# Altium PCB PCB1.PcbDoc
Units mm, origin at the board's own origin, x right, y up, seen from the top; angles counter-clockwise.
Board outline 99.5 x 83 mm, 2 copper layers (Top Layer, Bottom Layer), stack 1.135 mm thick; 86 components, 60 nets, 288 pads, 89 vias.
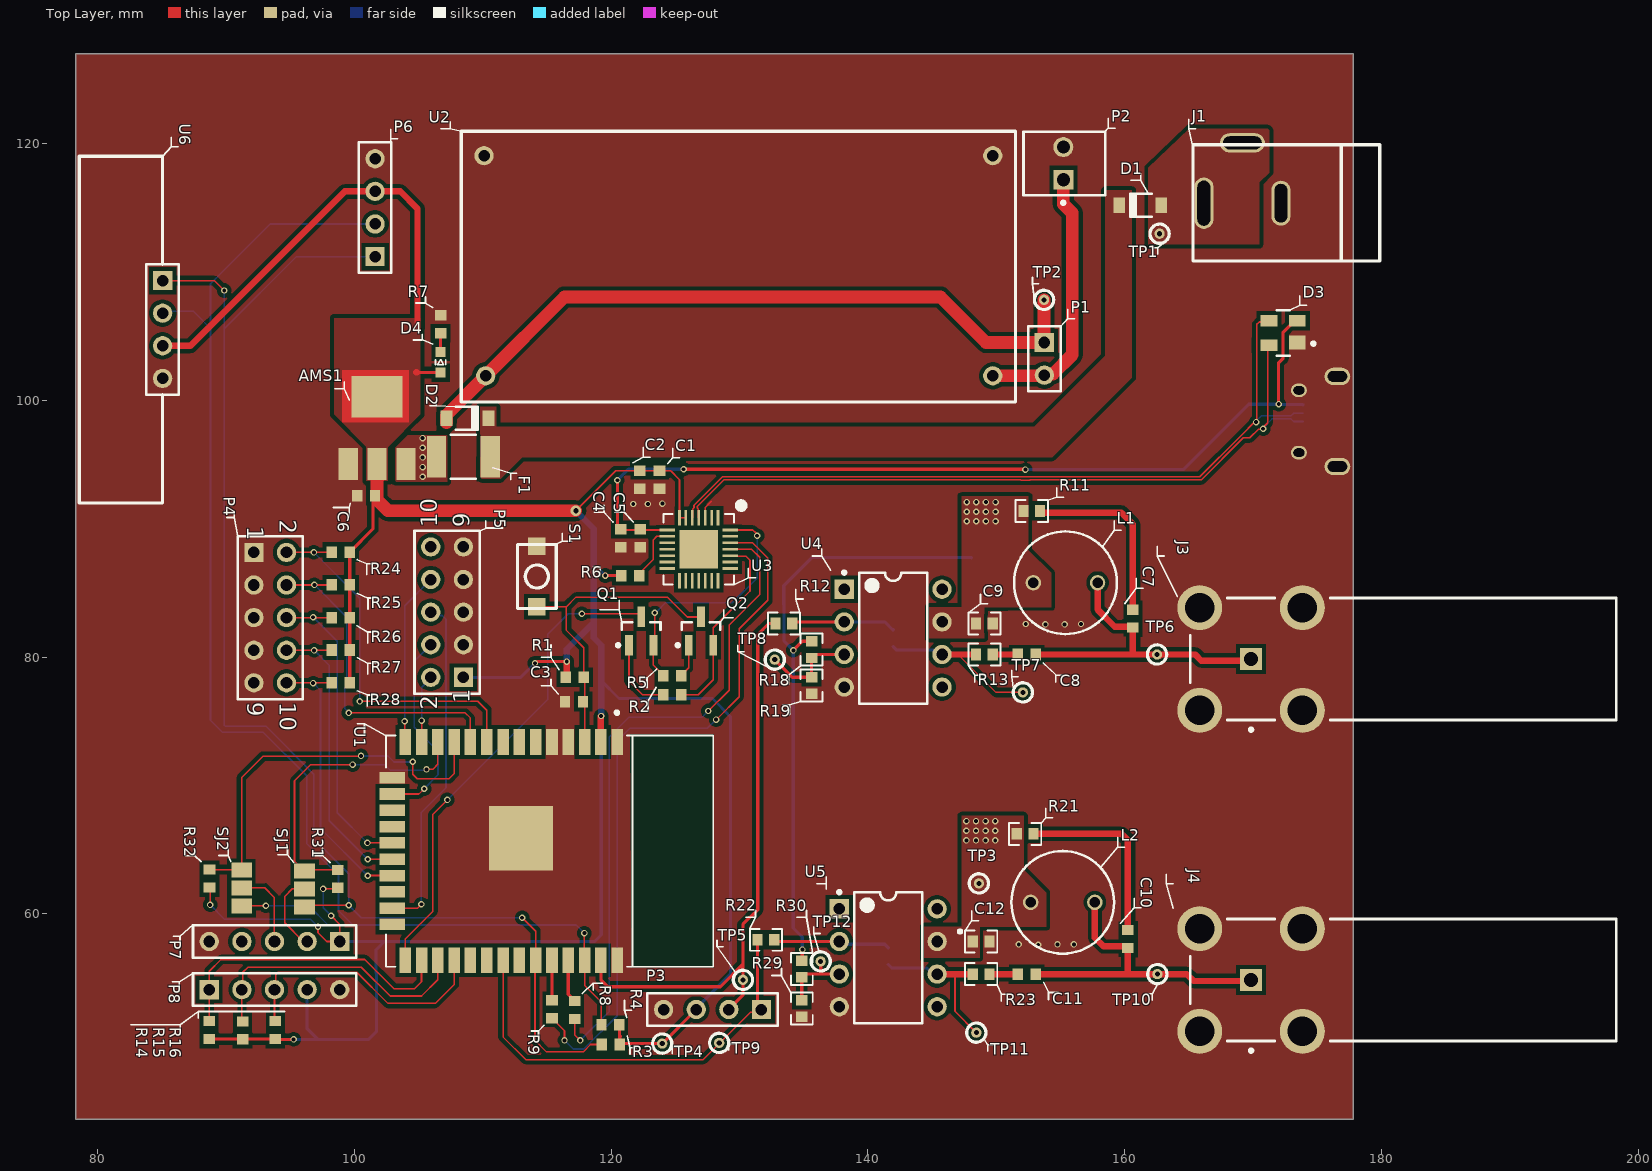
[diagram p0: Top Layer view]
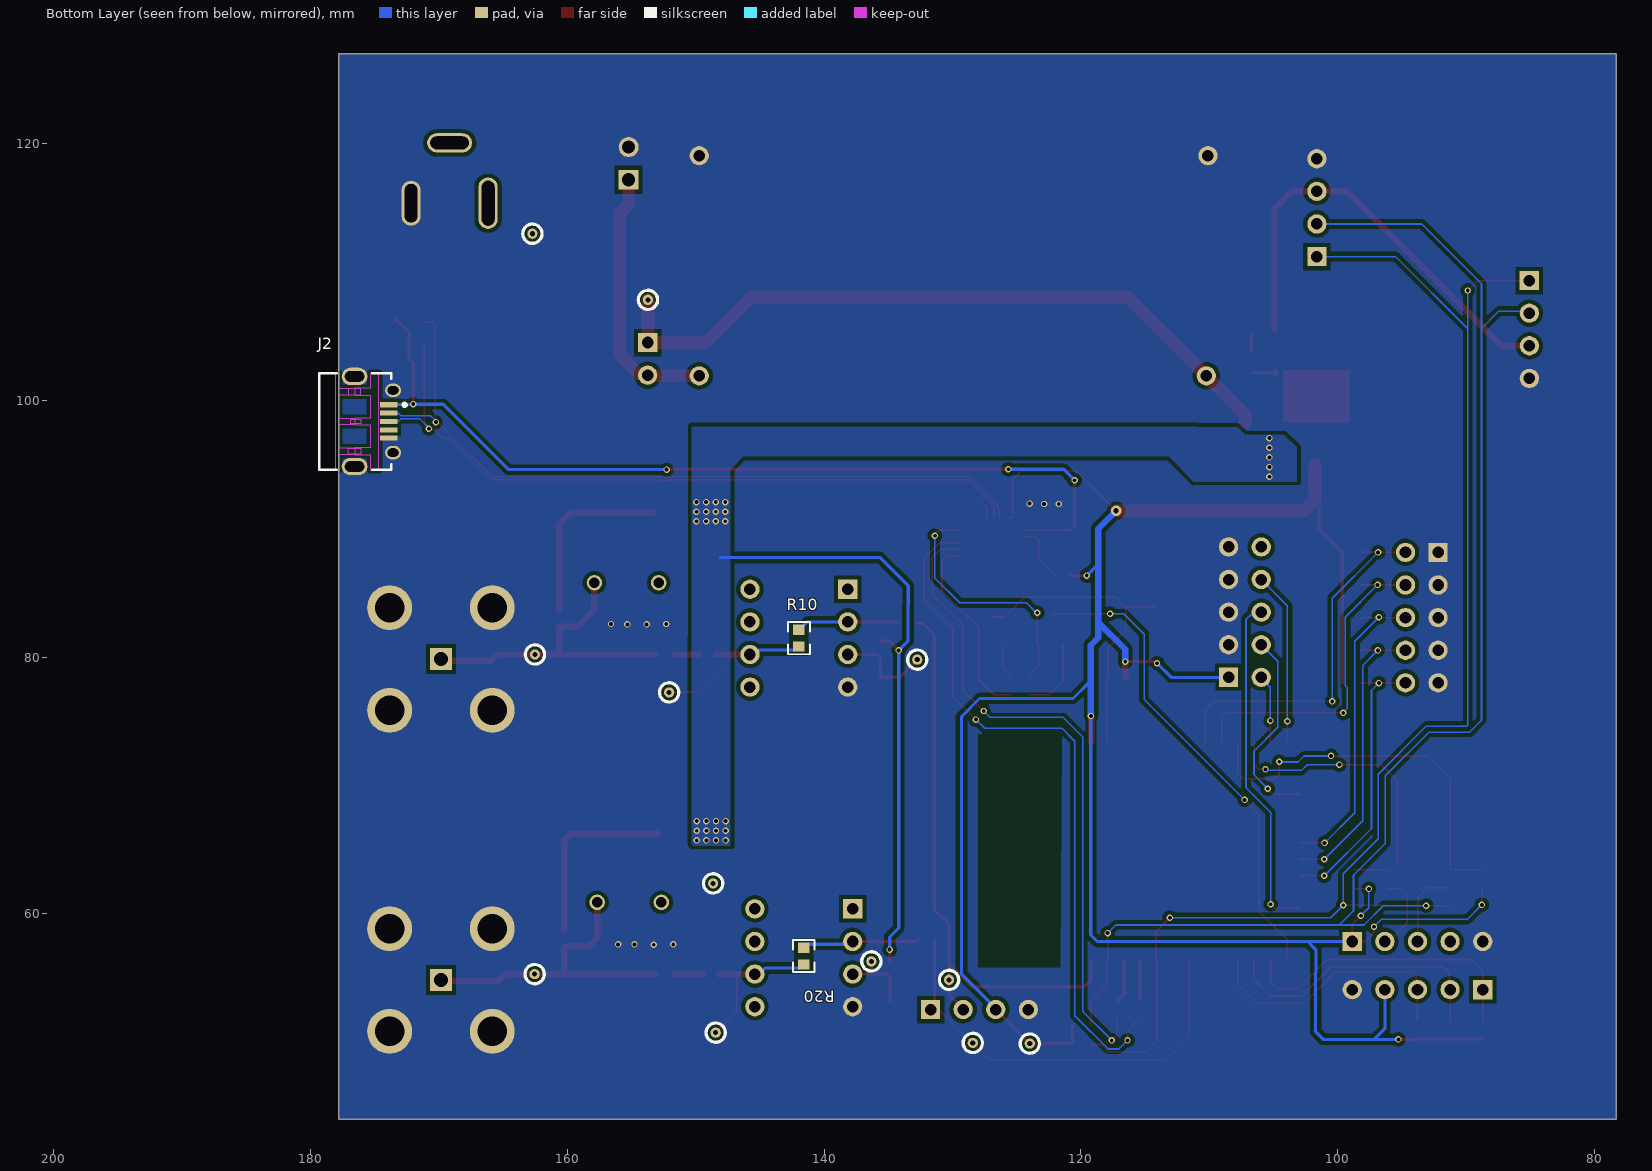
[diagram p1: Bottom Layer view, seen from below]
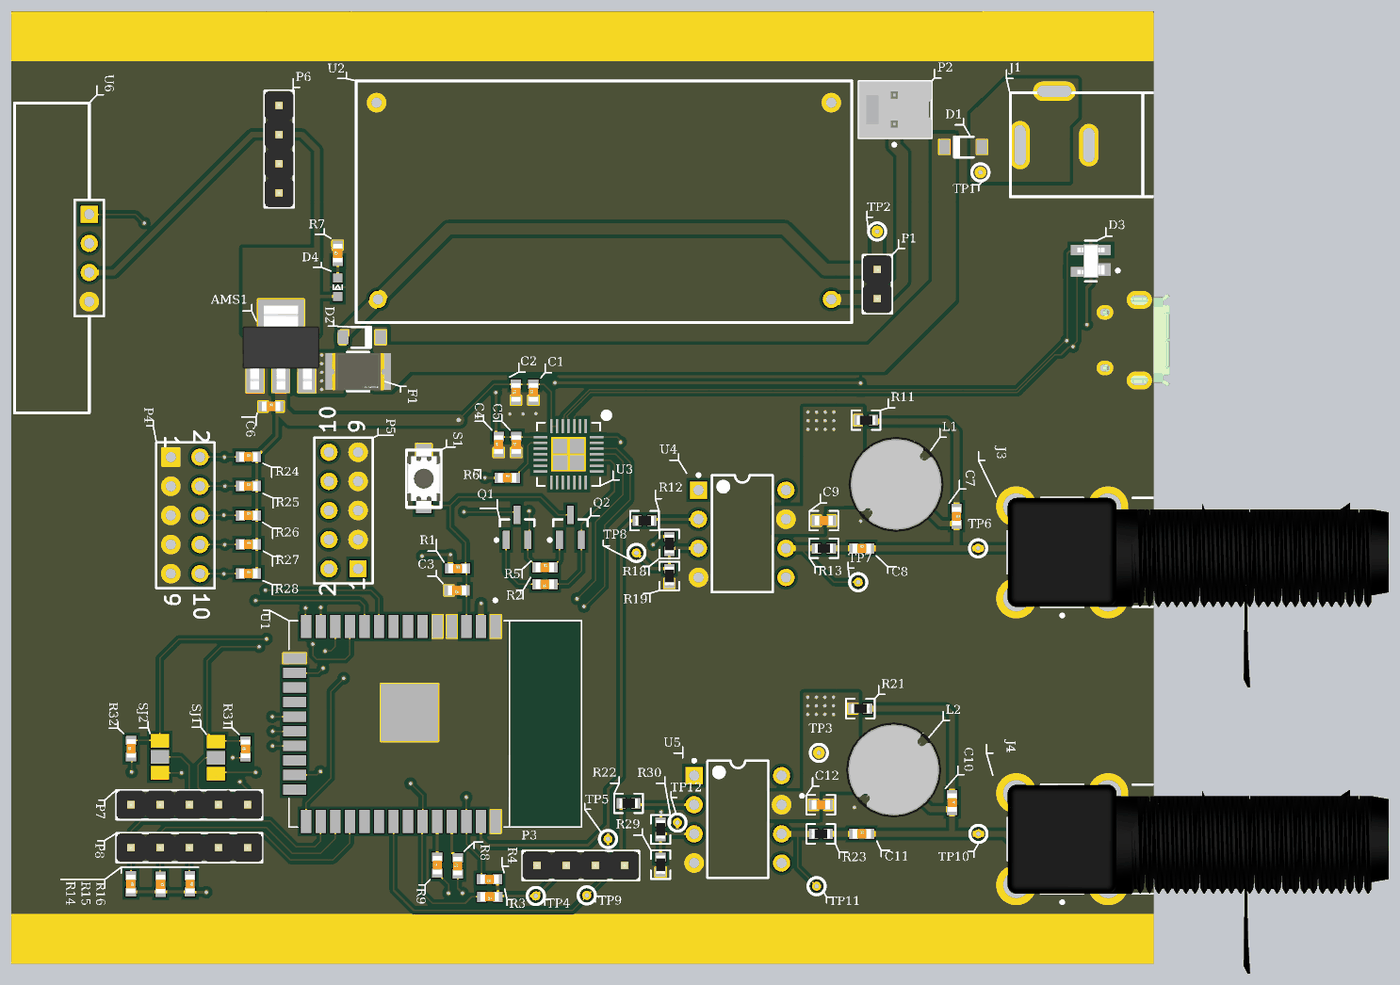
[diagram p2: 3D render of the assembled board from above, using the file's embedded part models]
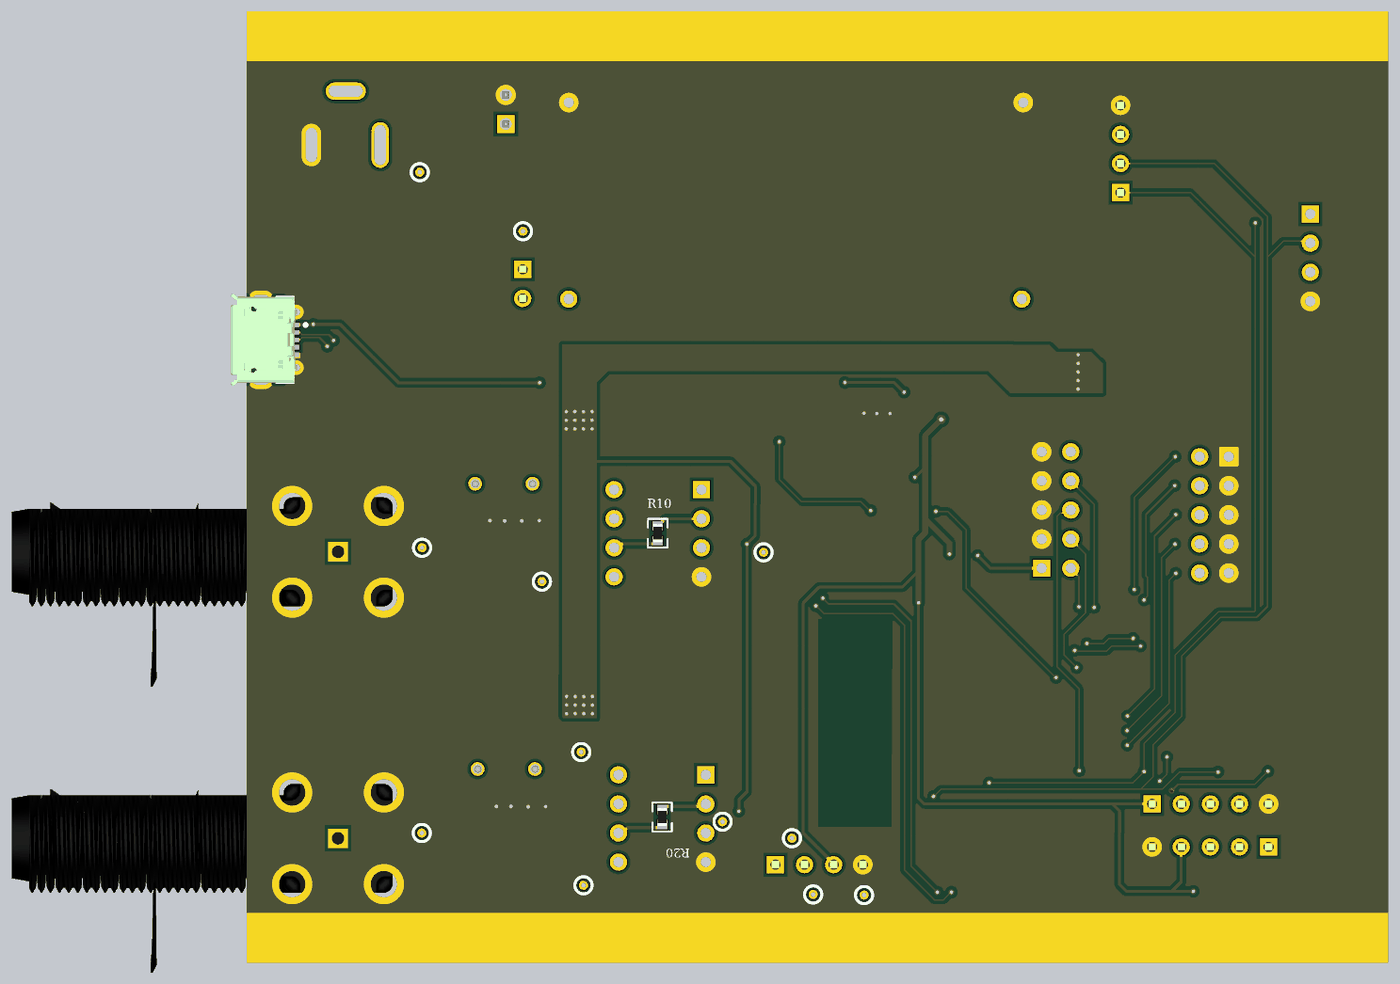
[diagram p3: 3D render of the assembled board from below, using the file's embedded part models]

## Layer stack, top to bottom
Top Solder: solder mask 0.0102, Solder Resist, Dk 3.5
Top Layer: signal copper 0.035
Dielectric 1: dielectric 1.065, FR-4, Dk 4.8
Bottom Layer: signal copper 0.035
Bottom Solder: solder mask 0.0102, Solder Resist, Dk 3.5

## Board outline
78.3,44 177.8,44 177.8,127 78.3,127

## Design rules (kind name [scope] priority, off if disabled: settings)
Clearance Clearance_1 [InPolygon] p1: gap=0.3 ignorepadtopadclearanceinfootprint=FALSE
Clearance [All] p2: gap=0.254 ignorepadtopadclearanceinfootprint=FALSE except(0: Arc-Hole Track-Hole SMDPad-Hole THPad-Hole Via-Hole Fill-Hole Poly-Hole Region-Hole Text-Hole)
DiffPairsRouting [All] p1: maxlimit=0.254 minlimit=0.125 mostfreqgap=0.125 toplayer_minwidth=0.125 toplayer_maxwidth=0.381 toplayer_prefwidth=0.125 bottomlayer_minwidth=0.125 bottomlayer_maxwidth=0.381 bottomlayer_prefwidth=0.125 maxuncoupledlength=12.7
PolygonConnect [All] p1: connectstyle=Direct reliefconductorwidth=0.254 reliefentries=4 polygonreliefangle="90 Angle" airgapwidth=0.254
RoutingVias [All] p1: holewidth=0.3 width=0.5 viastyle="Through Hole" minholewidth=0.3 minwidth=0.5 maxholewidth=0.3 maxwidth=0.5
SolderMaskExpansion [All] p1: expansion=0.102 istentingtop=FALSE
Width [All] p1: maxlimit=2 minlimit=0.1 preferedwidth=0.254
29 further rules are at their usual default settings.

## Classes and differential pairs
differential pair D: +D_P -D_N

## Components (designator, comment, footprint, x,y, rotation, side; value= is the part's Value field where it differs from the comment)
AMS1 "AMS1117" SOT-223-3 98.525,94.275 r0 top
C1 "10uF" "C 0603 / 1608" 123.776,93.808 r90 top
C2 "1uF" "C 0603 / 1608" 122.252,93.808 r90 top
C3 "100nF" "C 0603 / 1608" 117.119,76.534 r180 top
C4 "10uF" "C 0603 / 1608" 120.753,89.254 r90 top
C5 "1uF" "C 0603 / 1608" 122.277,89.254 r90 top
C6 "22uF" "C 0603 / 1608" 100.925,92.575 r0 top
C7 "Cap" "C 0603 / 1608" 160.64,82.996 r270 top value=54n
C8 "Cap" "C 0603 / 1608" 152.385,80.202 r0 top value=3.3u
C9 "Cap Pol1" CAP0603R 149.083,82.615 r0 top value=100u
C10 "Cap" "C 0603 / 1608" 160.259,58.039 r270 top value=54n
C11 "Cap" "C 0603 / 1608" 152.385,55.31 r0 top value=3.3u
C12 "Cap Pol1" CAP0603P 148.829,57.85 r0 top value=100u
D1 "B5819W" MCC-SOD123_V 161.223,115.189 r180 top
D2 "B5819W" MCC-SOD123_V 108.825,98.6 r0 top
D3 "Diode_Littelfuse_SP0503BAHTG_eec" Littelfuse_SP0503BAHTG_0 172.35,105.25 r90 top
D4 "LED" "LED 0603(2)" 106.725,102.925 r90 top
F1 "MF-MSMF014-2" FP-MF-MSMF-1-MFG 108.5,95.6 r180 top value=0.4-6.5Ω
J1 "PWR2.5" BARREL_JACK_5MM 166.175,115.35 r90 top locked
J2 "ZX62D-B-5P8" HIRO-ZX62D-B-5P8_V 175.075,98.35 r270 bottom
J3 "5-1634552-1" TE_5-1634552-1_0 181.7,79.85 r90 top locked
J4 "5-1634552-1" TE_5-1634552-1_0 181.7,54.85 r90 top locked
L1 "1mH" WE-TI-LS 155.393,85.79 r180 top
L2 "1mH" WE-TI-LS 155.179,60.898 r180 top
P1 "Header 2" HDR1X2 153.75,104.5 r270 top
P2 "22-23-2021" MOLX-22-23-2021_V 155.225,118.45 r90 top
P3 "Header 4" HDR1X4 131.715,52.55 r180 top
P4 "Header 5X2" HDR2X5 92.185,88.155 r270 top
P5 "Header 5X2" HDR2X5 108.5,78.42 r90 top
P6 "Header 4" HDR1X4 101.625,111.195 r90 top
P7 "Header 5" HDR1X5 98.87,57.85 r180 top
P8 "Header 5" HDR1X5 88.71,54.1 r0 top
Q1 "MMBT2222LT1G" ONSC-SOT-23-3-318-08_M 122.35,82.025 r90 top
Q2 "MMBT2222LT1G" ONSC-SOT-23-3-318-08_M 127,82.025 r90 top
R1 "Res1" "C 0603 / 1608" 117.181,78.439 r0 top value=10k
R2 "Res1" "C 0603 / 1608" 124.775,77.075 r180 top value=10k
R3 "Res1" "C 0603 / 1608" 119.975,49.825 r180 top value=4.7k
R4 "Res1" "C 0603 / 1608" 119.95,51.35 r180 top value=4.7k
R5 "Res1" "C 0603 / 1608" 124.775,78.55 r0 top value=10k
R6 "Res1" "C 0603 / 1608" 121.5,86.35 r0 top value=4.7k
R7 "Res1" "C 0603 / 1608" 106.725,105.925 r90 top value=1k
R8 "Res1" "C 0603 / 1608" 117.178,52.516 r90 top value=470
R9 "Res1" "C 0603 / 1608" 115.4,52.581 r90 top value=470
R10 "Res1" RES0603R 141.971,81.472 r270 bottom value=4.7k
R11 "Res1" RES0603R 152.766,91.378 r180 top value=50
R12 "Res1" RES0603R 133.462,82.615 r0 top value=4.7k
R13 "Res1" RES0603R 149.083,80.202 r0 top value=100
R14 "Res1" "C 0603 / 1608" 88.7,50.95 r270 top value=10k
R15 "Res1" "C 0603 / 1608" 91.3,50.925 r270 top value=10k
R16 "Res1" "C 0603 / 1608" 93.85,50.95 r270 top value=10k
R18 "Res1" RES0603R 135.621,80.583 r90 top value=1K
R19 "Res1" RES0603R 135.621,77.789 r90 top value=1K
R20 "Res1" RES0603R 141.59,56.707 r270 bottom value=4.7k
R21 "Res1" RES0603R 152.258,66.232 r180 top value=50
R22 "Res1" RES0603R 132.065,57.977 r0 top value=4.7k
R23 "Res1" RES0603R 148.829,55.31 r0 top value=100
R24 "Res1" "C 0603 / 1608" 98.95,88.175 r0 top value=10k
R25 "Res1" "C 0603 / 1608" 98.95,85.625 r0 top value=10k
R26 "Res1" "C 0603 / 1608" 98.95,83.075 r0 top value=10k
R27 "Res1" "C 0603 / 1608" 98.95,80.55 r0 top value=10k
R28 "Res1" "C 0603 / 1608" 98.95,78 r0 top value=10k
R29 "Res1" RES0603R 134.859,55.706 r90 top value=1K
R30 "Res1" RES0603R 134.859,52.628 r90 top value=1K
R31 "Res1" "C 0603 / 1608" 98.7,62.725 r90 top value=4.7k
R32 "Res1" "C 0603 / 1608" 88.725,62.75 r90 top value=4.7k
S1 "Switch" PUSH_SMD_3x4 112.725,88.775 r270 top
SJ1 "2-Way Solder Jumper" SOLDERJUMPER_2WAY_OPEN_NOPASTE 96.125,61.95 r270 top
SJ2 "2-Way Solder Jumper" SOLDERJUMPER_2WAY_OPEN_NOPASTE 91.225,62.025 r270 top
TP1 "Test Point" "Test POint" 162.725,112.975 r0 top
TP2 "Test Point" "Test POint" 153.725,107.825 r90 top
TP3 "Test Point" "Test POint" 148.65,62.375 r90 top
TP4 "Test Point" "Test POint" 123.985,49.9 r90 top
TP5 "Test Point" "Test POint" 130.275,54.863 r90 top
TP6 "Test Point" "Test POint" 162.525,80.202 r90 top
TP7 "Test Point" "Test POint" 152.075,77.25 r90 top
TP8 "Test Point" "Test POint" 132.75,79.8 r90 top
TP9 "Test Point" "Test POint" 128.425,49.95 r90 top
TP10 "Test Point" "Test POint" 162.55,55.31 r90 top
TP11 "Test Point" "Test POint" 148.45,50.75 r90 top
TP12 "Test Point" "Test POint" 136.325,56.3 r90 top
U1 "ESP32-WROOM-32D" MODULE_ESP32-WROOM-32D 115.22,64.891 r270 top locked
U2 "XL6009_boost_board" XL6009_board 151.511,120.956 r180 top locked
U3 "CP2102-GM" QFN28_5X5 126.833,88.402 r270 top value=Value
U4 "LM741CN/NOPB" P0008A 141.971,81.472 r0 top
U5 "LM741CN/NOPB" P0008A 141.59,56.58 r0 top
U6 "OLED_MODULE" OLED_MODULE 85.075,109.325 r270 top locked

## Footprints (in the part's own frame and the unit in brackets; to place one, negate y for a bottom-side part, rotate by r counter-clockwise, add the part's x,y. Pads: shape width x height; smd on the part's side, far side on the other; paste and mask are expansions set on the pad)
BARREL_JACK_5MM [mm]
  oval 4x1.5 hole 1 slot 3.5 at 0 deg: 1(0,0)
  oval 3.5x1.5 hole 1 slot 3 at 0 deg: 2(0,-6)
  oval 1.5x3.5 hole 1 slot 3 at 90 deg: 3(4.7,-3)
  silkscreen extent -4.5,-13.7 4.55,0.85
"C 0603 / 1608" [mm] "Capacitor 0603 / 1608 (1.6 x 0.8 mm)"
  rect 0.8x0.9 smd: 1(-0.7,0) 2(0.7,0)
  body extent -0.8,-0.4 0.8,0.4, height 0.3
CAP0603P [mm] "capacitor 0603 reflow soldering"
  rect 0.8x0.9 smd: 1(-0.65,0) 2(0.65,0)
  silkscreen extent -1.77,-0.85 1.25,0.9, body extent -0.8,-0.4 0.8,0.4, height 0.3
CAP0603R [mm] "capacitor 0603 reflow soldering"
  rect 0.8x0.9 smd: 1(-0.65,0) 2(0.65,0)
  silkscreen extent -1.25,-0.85 1.25,0.85, body extent -0.8,-0.4 0.8,0.4, height 0.3
FP-MF-MSMF-1-MFG [mm]
  rect 1.5x3.2 smd paste+0 mask+0: 1(-2.1,0) 2(2.1,0)
  silkscreen extent -0.97,-1.71 0.97,1.71, body extent -2.95,-1.81 2.95,1.81, height 0.25
HDR1X2 [mm] "Connector; Header; 2 Position"
  rect 1.5x1.5 hole 0.9: 1(0,0)
  round 1.5 hole 0.9: 2(2.54,0)
  silkscreen extent -1.27,-1.27 3.81,1.27, body extent -1.27,-1.24 3.81,1.25, height 8.54
HDR1X4 [mm] "Connector; Header; 4 Position"
  rect 1.5x1.5 hole 0.9: 1(0,0)
  round 1.5 hole 0.9: 2(2.54,0) 3(5.08,0) 4(7.62,0)
  silkscreen extent -1.27,-1.27 8.89,1.27, body extent -1.27,-1.24 8.89,1.25, height 8.54
HDR1X5 [mm] "Connector; Header; 5 Position"
  rect 1.5x1.5 hole 0.9: 1(0,0)
  round 1.5 hole 0.9: 2(2.54,0) 3(5.08,0) 4(7.62,0) 5(10.16,0)
  silkscreen extent -1.27,-1.27 11.43,1.27, body extent -1.27,-1.24 11.43,1.25, height 8.54
HDR2X5 [mm] "Connector; Header; 10 Position"
  rect 1.5x1.5 hole 0.9: 1(0,0)
  round 1.5 hole 0.9: 2(0,2.54) 3(2.54,0) 4(2.54,2.54) 5(5.08,0) 6(5.08,2.54) 7(7.62,0) 8(7.62,2.54) 9(10.16,0) 10(10.16,2.54)
  silkscreen extent -1.27,-1.27 11.43,3.81
HIRO-ZX62D-B-5P8_V [mm] "Micro-USB Connector, 9-Leads, Body 7.5x5.6mm, Pitch 0.65mm"
  rect 0.4x1.35 smd: 1(-1.3,1.175) 2(-0.65,1.175) 3(0,1.175) 4(0.65,1.175) 5(1.3,1.175)
  oval 1.05x1.25 hole 0.65 slot 0.85 at 90 deg: 6(-2.425,1.5) 7(2.425,1.5)
  oval 1.35x2 hole 0.825 slot 1.5 at 90 deg: 8(-3.512,-1.5) 9(3.512,-1.5)
  Top Layer keep-out region: -2.6,-1.5 -2.05,-1.5 -2.05,-0.275 -0.25,-0.275 -0.25,-1.5 0.25,-1.5 0.25,-0.275 2.05,-0.275 2.05,-1.5 2.6,-1.5 2.6,-0.275 3.75,-0.275 3.75,0.395 -3.75,0.395 -3.75,-0.275 -2.6,-0.275
  Top Layer keep-out region: -3.75,-2.725 -2.6,-2.725 -2.6,-1.5 -2.05,-1.5 -2.05,-2.725 -0.25,-2.725 -0.25,-1.5 0.25,-1.5 0.25,-2.725 2.05,-2.725 2.05,-1.5 2.6,-1.5 2.6,-2.725 3.75,-2.725 3.75,-2.95 -3.75,-2.95
  Top Layer keep-out region: -0.18,-1.8 -0.18,-1 0.18,-1 0.18,-1.8
  Top Layer keep-out region: -2.55,-2 -2.1,-2 -2.1,-1 -2.55,-1
  Top Layer keep-out region: 2.55,-2 2.1,-2 2.1,-1 2.55,-1
  silkscreen extent -3.75,-4.25 3.75,2.52, body extent -4.05,-4.15 4.05,1.65, height 2.75
"LED 0603(2)" [mm]
  rect 0.8x0.8 smd: 1(-0.762,0) 2(0.838,0)
  silkscreen extent -0.16,-0.4 0.24,0.4
Littelfuse_SP0503BAHTG_0 [mm]
  rect 1.1x1.3 smd paste+0 mask+0: 1(-0.75,-1.1)
  rect 0.9x1.3 smd paste+0 mask+0: 2(0.95,-1.1) 3(0.95,1.1) 4(-0.95,1.1)
  silkscreen extent -1.78,-2.48 1.78,0.5, body extent -1.45,-1.18 1.45,1.18, height 1.22
MCC-SOD123_V [mil] "SOD123, 2-Leads, Body 2.7x1.6mm, Height 1.35mm"
  rect 35.98x47.99 smd: 1(-64.5,0) 2(64.5,0)
  silkscreen extent -36,-35 31,35, body extent -53,-31 53,31, height 53
MODULE_ESP32-WROOM-32D [mm]
  rect 2x0.9 smd: 1(-8.5,5.26) 2(-8.5,3.99) 3(-8.5,2.72) 4(-8.5,1.45) 5(-8.5,0.18) 6(-8.5,-1.09) 7(-8.5,-2.36) 8(-8.5,-3.63) 9(-8.5,-4.9) 10(-8.5,-6.17) 11(-8.5,-7.44) 12(-8.5,-8.71) 13(-8.5,-9.98) 14(-8.5,-11.25) 25(8.5,-11.25) 26(8.5,-9.98) 27(8.5,-8.71) 28(8.5,-7.44) 29(8.5,-6.17) 30(8.5,-4.9) 31(8.5,-3.63) 32(8.5,-2.36) 33(8.5,-1.09) 34(8.5,0.18) 35(8.5,1.45) 36(8.5,2.72) 37(8.5,3.99) 38(8.5,5.26)
  rect 0.9x2 smd: 15(-5.715,-12.25) 16(-4.445,-12.25) 17(-3.175,-12.25) 18(-1.905,-12.25) 19(-0.635,-12.25) 20(0.635,-12.25) 21(1.905,-12.25) 22(3.175,-12.25) 23(4.445,-12.25) 24(5.715,-12.25)
  rect 5x5 smd: 39(-1,-2.24)
  silkscreen extent -10.88,-12.75 9,12.75
MOLX-22-23-2021_V [mm] "THD, 2-Leads, Body 6.35x4.93mm, Pitch 2.54mm"
  rect 1.55x1.55 hole 1.02: 1(-1.27,0)
  round 1.55 hole 1.02: 2(1.27,0)
  silkscreen extent -3.19,-3.25 2.46,3.1, body extent -2.46,-3.25 2.46,3.1, height 10.66
OLED_MODULE [mm]
  rect 1.5x1.5 hole 0.9: 1(0,0)
  round 1.5 hole 0.9: 2(2.54,0) 3(5.08,0) 4(7.62,0)
  silkscreen extent -9.69,-6.5 17.32,1.27
ONSC-SOT-23-3-318-08_M [mm] "SOT23, 3-Leads, Body 3.04x1.4mm, Pitch 0.95mm, IPC Low Density"
  rect 1.6x0.6 smd: 1(-1.1,0.95) 2(-1.1,-0.95) 3(1.1,0)
  silkscreen extent -1.22,-1.5 0.7,1.92, body extent -0.7,-1.52 0.7,1.52, height 1.11
P0008A [mm] "DIP, 8-Leads, Body 10.15x6.6mm, Pitch 2.54mm"
  rect 1.5x1.5 hole 0.9: 1(-3.81,3.81)
  round 1.5 hole 0.9: 2(-3.81,1.27) 3(-3.81,-1.27) 4(-3.81,-3.81) 5(3.81,-3.81) 6(3.81,-1.27) 7(3.81,1.27) 8(3.81,3.81)
  silkscreen extent -3.93,-5.1 2.65,5.23, body extent -3.95,-5.07 3.95,5.07, height 5.08
PUSH_SMD_3x4 [mm]
  rect 1.35x1.35 smd: 1(0.15,1.5) 2(4.85,1.5)
  silkscreen extent 0,0 5,3, body extent 0.05,0.05 4.95,2.95, height 2
QFN28_5X5 [mm]
  rect 1.2x0.203 smd paste+0 mask+0: 1(-2.45,1.5) 2(-2.45,1) 3(-2.45,0.5) 4(-2.45,0) 5(-2.45,-0.5) 6(-2.45,-1) 7(-2.45,-1.5) 15(2.45,-1.5) 16(2.45,-1) 17(2.45,-0.5) 18(2.45,0) 19(2.45,0.5) 20(2.45,1) 21(2.45,1.5)
  rect 0.203x1.2 smd paste+0 mask+0: 8(-1.5,-2.45) 9(-1,-2.45) 10(-0.5,-2.45) 11(0,-2.45) 12(0.5,-2.45) 13(1,-2.45) 14(1.5,-2.45) 22(1.5,2.45) 23(1,2.45) 24(0.5,2.45) 25(0,2.45) 26(-0.5,2.45) 27(-1,2.45) 28(-1.5,2.45)
  rect 3x3 smd paste-1.664 mask+0: 29(0,0)
  silkscreen extent -3.77,-2.75 2.75,3.67, body extent 0,0 0.25,0.25, height 0.25
RES0603R [mm] "resistor 0603 reflow soldering"
  rect 0.8x0.9 smd: 1(-0.65,0) 2(0.65,0)
  silkscreen extent -1.25,-0.85 1.25,0.85, body extent -0.8,-0.4 0.8,0.4, height 0.45
SOLDERJUMPER_2WAY_OPEN_NOPASTE [mil]
  rect 46x63 smd paste-31.5: 1(-55,0) 3(55,0)
  rect 46x63 smd: 2(0,0)
SOT-223-3 [mm]
  rect 1.5x2.5 smd: 1(1,0.75) 2(3.25,0.75) 3(5.5,0.75)
  rect 4x3.25 smd: 2(3.25,6)
  Top Layer region: 1.25,4.5 5.25,4.5 5.25,7.5 1.25,7.5
  body extent -0.1,-0.22 6.6,7.08, height 1.8
TE_5-1634552-1_0 [mm]
  rect 1.7x1.7 hole 1.1 paste-1000 mask+0: 1(0,11.85)
  round 3.5 hole 2.3 paste-1000 mask+0: 2(-4,15.85) 3(4,15.85) 4(-4,7.85) 5(4,7.85)
  silkscreen extent -5.62,-16.6 4.75,16.6, body extent -5.85,-16.85 5.85,17.7, height 0.25
"Test POint" [mm]
  round 0.8 hole 0.4: 1(0,0)
  silkscreen extent -0.75,-0.75 0.75,0.75
WE-TI-LS [mm] "THT Inductor, 2-Leads, Body 8.0 x 8.0 mm"
  round 1.2 hole 0.82: 1(-2.5,0) 2(2.5,0)
  silkscreen extent -4,-4 4,4, body extent -4.13,-4.13 4.15,4.15, height 5.5
XL6009_board [mm]
  round 1.5 hole 0.9: 1(1.778,19.05) 2(1.778,1.905) 3(41.275,19.05) 4(41.402,1.905)
  silkscreen extent 0,0 43.18,21.08

## Part data
AMS1: "LDO 3.3V/5V/12V"
C1 C2 C3 C4 C5 C6: library part Capacitor
C7 C8 C10 C11: "Capacitor", LatestRevisionDate=17-Jul-2002, LatestRevisionNote="Re-released for DXP Platform.", PackageDescription="Radial Cap, Thru-Hole; 2 Leads; 0.3 in Pin Spacing", PackageReference=RAD-0.3, Published=8-Jun-2000, Publisher="Altium Limited"
C9 C12: "Polarized Capacitor (Radial)", LatestRevisionDate=17-Jul-2002, LatestRevisionNote="Re-released for DXP Platform.", PackageDescription="Polarized Capacitor (Radial); 2 Leads", PackageReference=RB7.6-15, Published=8-Jun-2000, Publisher="Altium Limited"
D1 D2: library part CMP-2100-03587-1, "Schottky Barrier Rectifier, 1 A, 40 Vrm, -65 to 125 degC, 2-Pin SOD123, RoHS, Tape and Reel", Manufacturer="Micro Commercial Components", Package Description="2-Pin Small Outline Diode, Body 2.7 x 1.6 mm, Height 1.35 mm", Package Reference=SOD123, Datasheet URL=http://www.mccsemi.com/up_pdf/B5817W-B5819W(SOD-123).pdf, Datasheet Version="Rev. B, 01/2013", Manufacturer URL=http://www.mccsemi.com/, Package URL=http://www.mccsemi.com/up_pdf/1N4448W(SOD-123).pdf
D3: "DIODE TVS DIODE 5.5VWM 8.5VC SOT143", Digikey Part Number=F2715CT-ND, Manufacturer=Littelfuse, Mouser Part Number=576-SP0503BAHTG, Package=SOT143-4, Part Number=SP0503BAHTG, Temperature="-40°C to +85°C", Temperature Range High=+85°C, Temperature Range Low=-40°C, ComponentLink1Description=Upverter, ComponentLink1URL=https://upverter.com/upn/revision/6b5b591e3bf31c16/, ComponentLink2Description=Datasheet, ComponentLink2URL=http://www.littelfuse.com/~/media/electronics/datasheets/tvs_diode_arrays/littelfuse_tvs_diode_array_sp05_datasheet.pdf.pdf, Digikey Description="DIODE TVS DIODE 5.5VWM 8.5VC SOT143", HelpURL=https://upverter.com/upn/revision/6b5b591e3bf31c16/, Lead Free=yes, Price=0.571399033067, RoHS=TRUE, Supplier 1=Digi-Key, Supplier 2=Mouser, Supplier Part Number 1=F2715CT-ND, Supplier Part Number 2=576-SP0503BAHTG
F1: library part CMP-07400-000016-1, "PTC RESET FUSE 60V 140MA 1812", Ambient Temperature Range High=+85°C, Ambient Temperature Range Low=-40°C, Current Rating=40A, Hold Current=0.14A, Manufacturer=Bourns, Package=MF-MSMF-1, Resistance=0.4-6.5Ω, Temperature="-40°C to +85°C", Trip Current=0.34A, Voltage Rating=60V, Automotive=Yes, Automotive Grade="Grade 3", Category=Fuse, ComponentLink2Description=Datasheet, ComponentLink2URL=https://www.bourns.com/pdfs/mfmsmf.pdf, Device Class L1="Circuit Protection", Device Class L2="PTC Resettable Fuses", Device Class L3=unset, Digikey Description="PTC RESET FUSE 60V 140MA 1812", Height=1.1mm, Lead Free=Yes, Manufacturer Part Number=MF-MSMF014-2, Mouser Description="Resettable Fuses - PPTC 0.14A 60V 0.40ohm", Octopart=https://octopart.com/mf-msmf014-2-bourns-70906, RoHS=TRUE, Temperature Range High=+85°C, Temperature Range Low=-40°C, Trip Time=0.15s
J1: "Low Voltage Power Supply Connector", ComponentLink1Description="Manufacturer Link", ComponentLink1URL=http://domino.kycon.com/internet/Products.html, DatasheetDocument=09-May-2002, Published=17-Dec-2003, Publisher="Altium Limited"
J2: library part CMP-0029-00002-1, "Right Angle Receptacle Connector, Micro USB, 30 V(AC), -30 to 85 degC, 5-Pin SMD, RoHS, Tape and Reel", Capacitance="1 uF", Case Code (Imperial)=1206, Case Code (Metric)=3216, Max Operating Temperature=125degC, Min Operating Temperature=-55degC, Package Quantity=2000, Resistance="7.5 Ohm", Tolerance=10%, Voltage Rating="35 V", Case/Package=1206, ComponentLink1Description="Manufacturer URL", ComponentLink1URL=https://www.hirose.com, ComponentLink2Description=Datasheet, ComponentLink2URL=https://www.hirose.com/product/en/download_file/key_name/ZX62D-B-5P8/category/Catalog/doc_file_id/31704/?file_category_id=5&item_id=02420034000&is_series=, ComponentLink3Description="Package Specification", ComponentLink3URL=https://www.hirose.com/product/en/download_file/key_name/ZX62D-B-5P8/category/Drawing%20(2D)/doc_file_id/36535/?file_category_id=6&item_id=02420034000&is_series=, DatasheetVersion=Aug-16, ESR="7.5 Ohm", Height="1.8 mm", Length="3.2 mm", Mount="Surface Mount", PackageDescription="USB Connector, 5 Position Surface Mount, Length 8 mm, Height 2.65 mm", PackageReference=ZX62D-B-5P8, Packaging="Tape and Reel", Pins=2, Radiation Hardening=No, REACH SVHC="No SVHC", RoHSCompliant=True, Voltage Rating (DC)="35 V", Weight="0.000571 oz", Width="1.6 mm"
L1 L2: library part CMP-0225-00033-1, "Radial Leaded Wire Wound Inductor WE-TI, L = 1000 µH", Inductance="1000 ÂµH", ComponentLink1Description="Manufacturer Link", ComponentLink1URL=http://www.we-online.com, ComponentLink2Description=Datasheet, ComponentLink2URL=http://www.we-online.de/katalog/media/pdf/744741102.pdf, DatasheetVersion="ver 2, Nov-2004", PackageDescription="THT Inductor, 2-Leads, Body 8.0 x 8.0 mm", PackageReference=WE-TI-LS, PackageVersion=2004
P1: "Header, 2-Pin", LatestRevisionDate=17-Jul-2002, LatestRevisionNote="Re-released for DXP Platform.", Publisher="Altium Limited"
P2: library part CMP-1704-00001-3, "Male Header, Pitch 2.54 mm, 1 x 2 Position, Height 10.67 mm, Tail Length 3.56 mm, 0 to 75 degC, RoHS, Bulk", Max Operating Temperature="75 degC", Min Operating Temperature="0 degC", Package Quantity=3000, ComponentLink1Description="Manufacturer URL", ComponentLink1URL=http://www.molex.com/, ComponentLink2Description=Datasheet, ComponentLink2URL=https://datasheet.ciiva.com/19454/232266-19454304.pdf, Height="10.67 mm", Length="5.08 mm", Mount="Through Hole", Mounting Technology="Through Hole", PackageDescription="Male Header, Pitch 2.54 mm, 1 x 2 Position, Height 10.67 mm, Tail Length 3.56 mm", Packaging=Bulk, PartNumber=22-23-2021, Pins=2, Radiation Hardening=No, REACH SVHC=Unknown, RoHSCompliant=True, Width="6.35 mm"
P3 P6: "Header, 4-Pin", LatestRevisionDate=17-Jul-2002, LatestRevisionNote="Re-released for DXP Platform.", Publisher="Altium Limited"
P4 P5: "Header, 5-Pin, Dual row", LatestRevisionDate=17-Jul-2002, LatestRevisionNote="Re-released for DXP Platform.", Publisher="Altium Limited"
P7 P8: "Header, 5-Pin", LatestRevisionDate=17-Jul-2002, LatestRevisionNote="Re-released for DXP Platform.", Publisher="Altium Limited"
Q1 Q2: library part CMP-0722-00001-1, "General Purpose Transistor, NPN, 0.6 A IC Continuous, 3-Pin SOT23, RoHS, Tape and Reel", Manufacturer="ON Semiconductor", ComponentLink1Description="Manufacturer URL", ComponentLink1URL=http://www.onsemi.com/, ComponentLink2Description=Datasheet, ComponentLink2URL=http://www.onsemi.com/pub_link/Collateral/MMBT2222LT1-D.PDF, ComponentLink3Description="Package Specification", ComponentLink3URL=http://www.onsemi.com/pub_link/Collateral/MMBT2222LT1-D.PDF, DatasheetVersion="Rev. 10", FT="250 MHz", HFE Max.=300, HFE Min.=100, IC Continuous="0.6 A", Mounting Technology="Surface Mount", PackageDescription="3-Pin SOT23, Body 2.9 x 1.3 mm, Pitch 0.95 mm", PackageReference=SOT-23-3, PackageVersion="Rev. AP", Packing="Tape and Reel", PartNumber=MMBT2222LT1G, Polarity=NPN, PTM Max.="0.225 W", RoHS=TRUE, V(BR) CEO="30 V Min."
R1 R2 R3 R4 R5 R6 R7 R8 R9 R10 R11 R12 R13 R14 R15 R16 R18 R19 R20 R21 R22 R23 R24 R25 R26 R27 R28 R29 R30 R31 R32: "Resistor", LatestRevisionDate=17-Jul-2002, LatestRevisionNote="Re-released for DXP Platform.", PackageDescription="Axial Device, Thru-Hole; 2 Leads; 0.3 in Pin Spacing", PackageReference=AXIAL-0.3, Published=8-Jun-2000, Publisher="Altium Limited"
S1: library part B3U-1000P, Manufacturer=Omron, DIGIKEY=SW1020CT-ND, MPN=B3U-1000P
SJ1 SJ2: library part SOLDERJUMPER_2WAY
U1: "IC: SoC; GPIO, I2C, I2S, IR, SD, SDIO, SPI, UART; 2.7Ã·3.6VDC; 20dBm", Package="Module Espressif Systems", Availability=Warning, MF="Espressif Systems", MP=ESP32-WROOM-32D, Price="3.98 USD", SnapEDA_Link=https://www.snapeda.com/parts/ESP32-WROOM-32D/Espressif%20Systems/view-part/?ref=snap
U3: "No Description Available", Built_By=EMA_UL_Team, Copyright="Copyright (C) 2018 Accelerated Designs. All rights reserved", Manufacturer_Part_Number=CP2102-GM, RefDes=RefDes, Type=DEV, Vendor="Silicon Labs"
U4 U5: library part CMP-0055-00162-3, "Operational Amplifier, 8-pin MDIP, Pb-Free", Manufacturer="Texas Instruments", Package Reference=P0008A, PackageTopMarking=NSUZXYTTE#*LM*741CN, PowerWise=N, Code_JEDEC=MS-001-BA, ComponentLink1Description="Datasheet URL", ComponentLink1URL=http://www.ti.com/general/docs/lit/getliterature.tsp?genericPartNumber=LM741&fileType=pdf, CompType=Amplifiers, PackageDescription="MDIP, .365 x .250 x .130in, 8 Lead, .100in Pitch", PinCount=8, RoHS=Y

## Via types
v1: diameter 0.5, hole 0.3, Top Layer to Bottom Layer, tented both sides, 88 vias
v2: diameter 0.8, hole 0.4, Top Layer to Bottom Layer, tented both sides, 1 vias

## Nets (pads, with @x,y where several pads share a name; then routed paths per layer and width w, separated by ;. In a path a pad name is that pad's centre, name@x,y a point inside that pad or via, vN(x,y) a via of type N, cw(c..) or ccw(c..) an arc to the next point about the centre after c; other vN are vias at no path point)
AZ_PIN: P3.2 R12.1 TP5.1 U1.37 | length 45.4
  Top Layer w0.254: U1.37 119.21,54.865 119.75,54.325 128.525,54.325 130.275,56.075 ; P3.2 130.275,53.65 130.275,56.075 ; R12.1 132.301,82.615 131.425,81.739 131.425,60.325 130.275,59.175 130.275,56.075
CTS: U3.23
D_N: D3.3 J2.2 U3.5 | length 60.1
  Top Layer w0.125: U3.5 126.372,90.891 126.372,91.54 126.458,91.626 126.458,91.833 128.675,94.05 152.024,94.05 152.04,94.033 152.51,94.033 152.526,94.05 165.86,94.05 168.959,97.148 170.3,98.49 170.3,103.702 170.283,103.719 170.283,104.881 170.3,104.898 170.3,105.913 170.486,106.099 171.149,106.099 D3.3
  Bottom Layer w0.125: v1(170.241,98.301) 170.241,98.382 170.659,98.8 172.963,98.8 173.163,99 J2.2
D_P: D3.4 J2.3 U3.4 | length 57.7
  Top Layer w0.125: U3.4 126.794,90.891 126.794,91.54 126.708,91.626 126.708,91.73 128.778,93.8 151.92,93.8 151.937,93.783 152.613,93.783 152.63,93.8 165.964,93.8 169.239,97.075 169.75,97.075 170.43,97.755 170.658,97.755 171.15,98.246 171.15,104.2 D3.4
  Bottom Layer w0.125: v1(170.791,97.786) 170.791,97.866 171.475,98.55 172.963,98.55 173.163,98.35 J2.3
DCD: U3.1
DSR: U3.27
DTR: Q1.2 R5.1 U3.28 | length 20
  Top Layer w0.125: v1(123.4,83.45) 123.4,81.025 Q1.2 123.3,79.375 124.075,78.6 R5.1 ; U3.28 131.048,89.902 131.263,89.687 131.263,89.664 131.376,89.551 v1(131.376,89.454)
  Bottom Layer w0.125: v1(123.4,83.45) 123.4,83.502 123.473,83.575 123.6,83.575 124.25,84.225 129.45,84.225 131.375,86.15 v1@131.375,89.453
EL_PIN: P3.1 R22.1 TP9.1 U1.31 | length 34
  Top Layer w0.125: U1.31 111.59,50.41 113.35,48.65 127.175,48.65 130.851,52.326 131.491,52.326 P3.1
  Top Layer w0.254: R22.1 131.415,52.85 P3.1
ENC_CLK: P8.1 R14.1 U1.26 | length 23.6
  Top Layer w0.125: R14.1 88.71,51.66 P8.1 88.71,55.535 89.625,56.45 100.825,56.45 103.1,54.175 104.7,54.175 105.24,54.715 U1.26
ENC_DT: P8.2 R15.1 U1.27 | length 22.2
  Top Layer w0.125: R15.1 91.25,51.675 P8.2 91.325,54.175 91.325,55.45 91.725,55.85 100.55,55.85 102.8,53.6 105.241,53.6 106.51,54.869 U1.27
ENC_SW: P8.3 R16.1 U1.28 | length 21.2
  Top Layer w0.125: R16.1 93.79,51.71 P8.3 93.875,54.185 93.875,55.25 94.075,55.45 100.2,55.45 102.625,53.025 106.3,53.025 107.78,54.505 U1.28
ESP_SW1: P4.2 R24.1 U1.9 | length 29.2
  Top Layer w0.125: P4.2 v1(96.854,88.155) 98.23,88.155 R24.1 ; v1(100.425,76.55) 109.625,76.55 110.32,75.855 U1.9
  Bottom Layer w0.125: v1@96.871,88.138 100.425,84.584 v1(100.425,76.55)
ESP_SW2: P4.4 R25.1 U1.10 | length 26.2
  Top Layer w0.125: P4.4 98.24,85.615 R25.1 ; v1(99.575,75.65) 108.65,75.65 109.05,75.25 U1.10
  Bottom Layer w0.125: v1(96.9,85.625) 99.412,83.113 99.412,77.776 99.275,77.639 99.275,75.969 99.575,75.669 v1(99.575,75.65)
ESP_SW3: P4.6 R26.1 U1.19 | length 24.8
  Top Layer w0.125: P4.6 R26.1 ; v1(101.025,65.525) 101.026,65.526 U1.19
  Bottom Layer w0.125: v1(96.8,83.1) 98.675,81.225 98.675,67.875 v1(101.025,65.525)
ESP_SW4: P4.8 R27.1 U1.20 | length 23.5
  Top Layer w0.125: P4.8 98.235,80.535 R27.1 ; v1(101.05,64.25) 102.964,64.25 U1.20
  Bottom Layer w0.125: v1(96.875,80.525) 98.05,79.35 98.05,67.25 v1(101.05,64.25)
ESP_SW5: P4.10 R28.1 U1.21 | length 22.2
  Top Layer w0.125: P4.10 98.245,77.995 R28.1 ; v1(101.05,62.975) 101.061,62.986 U1.21
  Bottom Layer w0.125: v1(96.8,77.975) 97.375,77.4 97.375,66.65 v1(101.05,62.975)
GND: AMS1.1 C1.1 C2.1 C3.2 C4.1 C5.1 C6.1 C9.2 C12.2 D3.1 J1.2 J2.5 J2.6 J2.7 J2.8 J2.9 J3.2 J3.3 J3.4 J3.5 J4.2 J4.3 J4.4 J4.5 P2.2 P3.4 P4.1 P4.3 P4.5 P4.7 P4.9 P5.3 P5.5 P5.7 P5.9 P6.4 P7.5 P8.5 R7.2 R19.1 R30.1 S1.1 U1.1 U1.4 U1.5 U1.15 U1.38 U1.39 U2.2 U2.4 U3.3 U4.4 U5.4 U6.4 | length 1.5
  Top Layer w0.125: U3.3 127.333,91.658 127.8,92.125
  other v1: 153.275,57.6 151.75,57.625 154.775,57.625 156.05,57.625 153.825,82.55 155.325,82.55 152.3,82.575 156.6,82.575 121.725,91.925 122.875,91.925 124,91.95
GPIO0: Q1.3 U1.25 | length 38
  Top Layer w0.125: U1.25 103.97,58.045 106.125,60.2 106.125,67.75 v1(107.25,68.875) ; v1(117.725,83.375) 122.113,83.375 122.35,83.138 Q1.3
  Bottom Layer w0.125: v1(107.25,68.875) 115.075,76.7 115.075,81.775 116.675,83.375 v1(117.725,83.375)
JTAG_RST: C3.1 Q2.3 R1.2 S1.2 U1.3 | length 25
  Top Layer w0.125: S1.2 116.525,83.925 ; R1.2 117.875,78.445 117.875,80.725 116.525,82.075 116.525,83.925 ; U1.3 117.94,76.534 117.94,78.365 118.064,78.489 R1.2@118.064,78.539 ; Q2.3 125.925,83.125 124.375,84.675 117.275,84.675 116.525,83.925
JTAG_TCK: P5.4 U1.16 | length 15.6
  Top Layer w0.125: U1.16 105.036,69.336 v1(105.45,69.75)
  Bottom Layer w0.125: v1(105.45,69.75) 106.525,70.825 106.525,72.675 104.675,74.525 104.675,79.675 P5.4
JTAG_TDI: P5.8 U1.14 | length 13.5
  Top Layer w0.125: v1(103.925,75) 103.925,73.436 U1.14
  Bottom Layer w0.125: v1(103.925,75) 103.925,84.005 P5.8
JTAG_TDO: P5.6 U1.23 | length 26.8
  Top Layer w0.125: U1.23 104.921,60.446 v1(105.225,60.75)
  Bottom Layer w0.125: v1(105.225,60.75) 105.225,67.9 107.15,69.825 107.15,82.95 106.863,83.237 106.223,83.237 P5.6
JTAG_TMS: P5.2 U1.13 | length 5.3
  Top Layer w0.125: U1.13 105.25,73.401 v1(105.25,75.05)
  Bottom Layer w0.125: v1(105.25,75.05) 105.25,77.661 105.96,78.371 P5.2
LED_4: U1.29
NetC7_1: C7.1 R11.1 | length 14.4
  Top Layer w0.5: R11.1@153.274,91.251 159.751,91.251 160.64,90.362 C7.1
NetC7_2: C7.2 C8.2 J3.1 L1.1 TP6.1 | length 24.6
  Top Layer w0.254: C7.2@160.575,82.361 C7.2
  Top Layer w0.5: C8.2 160.64,80.202 ; L1.1 157.893,83.711 159.243,82.361 C7.2@160.575,82.361 ; C7.2 160.64,80.202 ; TP6.1@162.525,80.1 162.582,80.157 162.795,80.157 162.839,80.202 165.498,80.202 165.975,79.725 169.725,79.725 J3.1 ; TP6.1 160.64,80.202
NetC8_1: C8.1 R13.2 | length 2
  Top Layer w0.5: R13.2 C8.1
NetC10_1: C10.1 R21.1 | length 14.5
  Top Layer w0.5: R21.1 159.751,66.232 160.259,65.724 C10.1
NetC10_2: C10.2 C11.2 J4.1 L2.1 TP10.1 | length 24.7
  Top Layer w0.254: C10.2@160.129,57.469 C10.2
  Top Layer w0.5: C11.2 160.259,55.31 ; L2.1 157.679,58.144 158.354,57.469 C10.2@160.129,57.469 ; C10.2 160.259,55.31 ; J4.1 169.775,54.775 165.375,54.775 164.84,55.31 160.259,55.31
NetC11_1: C11.1 R23.2 | length 2.2
  Top Layer w0.5: R23.2 C11.1
NetD1_1: D1.1 J1.1 J1.3 TP1.1
NetD1_2: D1.2 D2.2 F1.1
NetD2_1: D2.1 P1.1 TP2.1 U2.3 | length 55.8
  Top Layer w1: D2.1@107.175,98.275 107.175,98.845 U2.3 116.38,108.05 145.65,108.05 149.2,104.5 P1.1 153.725,104.525 TP2.1
NetD4_2: D4.2 R7.1 | length 1.5
  Top Layer w0.25: D4.2 R7.1
NetP1_2: P1.2 P2.1 U2.1 | length 20.8
  Top Layer w1: U2.1 P1.2@153.75,101.906 ; P1.2 153.846,102.056 154.431,102.056 155.925,103.55 155.925,114.598 155.225,115.298 P2.1
NetP7_2: P7.2 SJ1.2 | length 6.2
  Top Layer w0.125: SJ1.2 95.175,61.95 94.577,61.352 94.577,59.298 96.025,57.85 P7.2
NetP7_3: P7.3 SJ2.2 | length 6.3
  Top Layer w0.125: SJ2.2 93.025,62.025 93.775,61.275 93.775,57.865 P7.3
NetQ1_1: Q1.1 R2.2 | length 5.9
  Top Layer w0.125: Q1.1 121.4,78.125 122.45,77.075 R2.2
NetQ2_1: Q2.1 R5.2 | length 2.6
  Top Layer w0.125: R5.2 125.475,78.6 126.05,79.175 Q2.1
NetR6_2: R6.2 U3.9 | length 4.6
  Top Layer w0.125: R6.2@121.961,86.271 123.293,87.603 123.293,89.127 123.568,89.402 U3.9
NetR10_1: R10.1 R12.2 U4.2 | length 8.2
  Top Layer w0.254: R12.2 134.239,82.742 U4.2
  Bottom Layer w0.254: U4.2 141.301,82.742 141.921,82.122 R10.1
NetR10_2: R10.2 R13.1 TP7.1 U4.6 | length 13
  Top Layer w0.125: 147.023,80.202 149.975,77.25 TP7.1
  Top Layer w0.5: U4.6 147.023,80.202 R13.1
  Bottom Layer w0.254: R10.2 142.244,80.549 145.097,80.549 145.444,80.202 U4.6
NetR18_1: R18.1 R19.2 TP8.1 U4.3 | length 7.6
  Top Layer w0.254: TP8.1 134.111,78.439 R19.2 R18.1 135.89,80.202 U4.3
NetR20_1: R20.1 R22.2 U5.2 | length 9.1
  Top Layer w0.254: R22.2 132.842,57.85 U5.2
  Bottom Layer w0.254: U5.2 138,57.63 141.317,57.63 R20.1
NetR20_2: R20.2 R23.1 TP11.1 U5.6 | length 12.1
  Top Layer w0.125: 146.79,55.31 146.79,52.41 TP11.1
  Top Layer w0.5: U5.6 146.79,55.31 R23.1
  Bottom Layer w0.254: R20.2 141.863,55.784 144.589,55.784 145.063,55.31 U5.6
NetR29_1: R29.1 R30.2 TP12.1 U5.3 | length 5.8
  Top Layer w0.254: R30.2 R29.1 135.113,55.31 136.447,55.31 ; TP12.1 136.325,55.432 136.447,55.31 ; U5.3 136.447,55.31
RI: U3.2
RTS: Q2.2 R2.1 U3.24 | length 15.2
  Top Layer w0.125: R2.1 126.8,77.075 127.95,78.225 Q2.2 127.95,82.275 130.825,85.15 130.825,87.55 130.512,87.863 129.322,87.863 U3.24
RX_CP: R8.1 U3.25 | length 51.1
  Top Layer w0.125: R8.1 117.178,50.572 v1(117.6,50.15) ; v1(127.575,75.8) 129.2,77.425 129.2,82.5 131.575,84.875 131.575,87.775 130.948,88.402 U3.25
  Bottom Layer w0.125: v1(117.6,50.15) 119.875,52.425 119.875,73.8 121.375,75.3 127.075,75.3 v1(127.575,75.8)
RXD0: R9.2 U1.34 | length 3.1
  Top Layer w0.25: R9.2 U1.34
SCL_ESP: P6.2 R4.2 SJ2.3 U1.36 U6.2 | length 110.8
  Top Layer w0.125: SJ2.3 91.233,60.636 v1(93.118,60.636) ; v1(117.925,58.5) 117.925,56.406 U1.36 117.95,56.381 117.95,54.425 119.25,53.125 R4.2
  Bottom Layer w0.125: U6.2 85.24,106.95 87.45,106.95 88.8,105.6 ; v1(93.118,60.636) 96.448,60.636 97.95,59.133 99.891,59.133 ; P6.2 93.46,113.735 88.8,109.075 88.8,105.6 ; v1(117.925,58.5) 117.292,59.133 99.891,59.133 ; 88.8,105.6 88.8,75.089 89.739,74.15 92.9,74.15 96.3,70.75 96.3,65.475 98.775,63 98.775,60.25 99.891,59.133
SCL_ESP1: R32.2 SJ2.1 U1.11 | length 30.9
  Top Layer w0.125: R32.2 91.197,63.45 SJ2.1 91.225,70.6 92.9,72.275 100.5,72.275 v1(100.525,72.3) ; v1(104.556,71.853) 104.556,70.869 104.9,70.525 107.375,70.525 107.78,70.93 U1.11
  Bottom Layer w0.125: v1(100.525,72.3) 102.625,72.3 103.1,71.825 104.528,71.825 v1(104.556,71.853)
SDA_ESP: P6.1 R3.2 SJ1.3 U1.33 U6.1 | length 106.2
  Top Layer w0.125: U6.1 85.085,109.315 89.11,109.315 v1(89.875,108.55) ; SJ1.3 96.247,60.675 v1(99.575,60.675) ; v1(113.075,59.7) 114.13,58.645 U1.33 114.075,56.336 114.075,50.15 114.975,49.25 117.825,49.25 118.4,49.825 R3.2
  Bottom Layer w0.125: v1(89.875,108.55) 89.875,105.575 ; P6.1 95.495,111.195 89.875,105.575 ; v1(113.075,59.7) 100.55,59.7 v1(99.575,60.675) 99.575,63.125 96.85,65.85 96.85,70.872 93.097,74.625 89.948,74.625 89.875,74.698 89.875,105.575
SDA_ESP1: R31.2 SJ1.1 U1.12 | length 23.8
  Top Layer w0.125: R31.2 96.203,63.425 SJ1.1 95.35,64.122 95.35,70.375 96.6,71.625 v1(99.875,71.625) ; v1(105.625,71.25) 105.65,71.275 106.125,71.275 106.51,71.66 U1.12
  Bottom Layer w0.125: v1(99.875,71.625) 102.375,71.625 102.825,71.175 105.449,71.175 105.524,71.25 v1(105.625,71.25)
SDB: U1.30
TX_CP: R9.1 U3.26 | length 55.1
  Top Layer w0.125: R9.1 115.45,51.881 115.787,51.543 115.787,51.483 116.375,50.895 v1(116.375,50.15) ; v1(128.18,75.13) 128.225,75.175 128.25,75.175 129.975,76.9 129.975,82.2 131,83.225 132.2,84.425 132.2,87.725 131.023,88.902 U3.26
  Bottom Layer w0.125: v1(116.375,50.15) 117.05,49.475 117.875,49.475 120.475,52.075 120.475,73.45 121.475,74.45 127.5,74.45 v1(128.18,75.13)
TXD0: R8.2 U1.35 | length 3.4
  Top Layer w0.25: U1.35 116.67,53.724 116.853,53.541 116.853,53.491 117.128,53.216 R8.2
VBus: C4.2 C5.2 D3.2 J2.1 U3.8 | length 70.5
  Top Layer w0.125: C4.2@120.805,89.902 U3.8
  Top Layer w0.25: v1(120.5,93.775) 120.5,90.207 C4.2 ; v1(125.65,94.625) 152.25,94.625 v1(152.275,94.6) ; v1@171.975,99.652 171.975,102.9 172.346,103.271 172.346,105.296 173.334,106.284 173.366,106.284 D3.2
  Bottom Layer w0.25: v1(120.5,93.775) 121.35,94.625 v1(125.65,94.625) ; v1(152.275,94.6) 164.575,94.6 169.675,99.7 v1@171.775,99.7 ; v1(172,99.7) 172.025,99.675 173.875,99.675 J2.1
VCC: AMS1.3 C9.1 C12.1 F1.2 L1.2 L2.2 R11.2 R18.2 R21.2 R29.2 TP3.1 U4.7 U5.7 | length 47.1
  Top Layer w0.254: v1(134.2,80.525) 134.908,81.233 R18.2 ; R29.2 134.9,56.397 v1(134.9,57.219)
  Bottom Layer w0.254: v1(134.9,57.219) 134.9,58.2 134.2,58.9 v1(134.2,80.525) 133.475,81.25 133.475,84.025 133.45,84.05 133.45,85.55 135.65,87.75 148.05,87.75 148.075,87.725
  other v1: 147.675,65.725 148.425,65.725 149.175,65.725 149.925,65.725 147.675,66.475 148.425,66.475 149.175,66.475 149.925,66.475 147.675,67.225 148.425,67.225 149.175,67.225 149.925,67.225 147.7,90.575 148.45,90.575 149.2,90.575 149.95,90.575 147.7,91.325 148.45,91.325 149.2,91.325 149.95,91.325 147.7,92.075 148.45,92.075 149.2,92.075 149.95,92.075 105.325,94.05 105.325,94.8 105.325,95.55 105.325,96.3 105.325,97.05
VCC3V3: AMS1.2 C1.2 C2.2 C6.2 D4.1 P3.3 P5.1 P6.3 P7.1 P8.4 R1.1 R3.1 R4.1 R6.1 R14.2 R15.2 R16.2 R24.2 R25.2 R26.2 R27.2 R28.2 R31.1 R32.1 TP4.1 U1.2 U3.6 U3.7 U6.3 | length 245.3
  Top Layer w0.125: R32.1 88.775,62 v1(88.775,60.7) ; v1(97.175,59) 97.175,58.525 97.85,57.85 P7.1 98.87,59.18 v1(98.2,59.85) ; v1(97.575,61.95) 98.625,61.95 R31.1 ; v2(117.257,91.4) 120.365,94.508 C2.2 C1.2 124.642,94.508 125.333,93.817 U3.7 U3.6
  Top Layer w0.25: R14.2 R16.2 93.875,50.225 v1(95.275,50.225) ; R28.2 R27.2 R26.2 R25.2 R24.2 101.45,89.975 101.45,93.7 101.775,94.025 101.8,94.05 AMS1.2@101.8,94.1 ; 104.862,102.163 D4.1 ; v1(114.075,79.525) 114.143,79.525 114.268,79.65 v1(116.55,79.65) ; v1(119.55,86.35) R6.1 ; R4.1 120.65,50.55 120.725,50.475 ; R3.1 120.675,50.475 ; R3.1@120.675,49.9 TP4.1 P3.3
  Top Layer w0.5: U6.3 85.085,104.235 87.235,104.235 99.275,116.275 P6.3 103.575,116.275 104.925,114.925 104.925,105.575 ; 104.825,102.2 104.862,102.163 ; R1.1 116.55,78.508 v1(116.55,79.65) ; U1.2 119.21,75.39 v1(119.23,75.41)
  Top Layer w1: C6.2@101.775,92.5 101.775,94.025 AMS1.2@101.775,95.025 ; C6.2@101.8,92.225 102.625,91.4 v2(117.257,91.4) ; AMS1.2@101.8,93.825 AMS1.2@101.8,94.05
  Bottom Layer w0.125: v1(88.775,60.7) 89.9,59.575 96.6,59.575 v1(97.175,59) ; v1(97.575,61.95) 97.575,60.475 v1(98.2,59.85)
  Bottom Layer w0.25: v1(95.275,50.225) 97.15,50.225 ; P8.4 96.33,51.045 97.15,50.225 ; P7.1 102.35,57.85 ; P5.1 112.97,78.42 v1(114.075,79.525) ; 118.65,87.25 v1(119.55,86.35) ; v1(119.23,75.41) 119.23,58.355 118.725,57.85 102.35,57.85 ; 119.23,78.165 120.62,76.775 127.9,76.775 129.3,75.375 129.3,55.3 126.635,52.635 P3.3 ; 97.15,50.225 101.125,50.225 101.725,50.825 101.725,55.375 101.7,55.4 101.7,57.2 102.35,57.85
  Bottom Layer w0.5: v1(116.55,79.65) 116.55,80.6 118.65,82.7 ; v2(117.257,91.4) 118.65,90.007 118.65,87.25 118.65,82.7 ; v1(119.23,75.41) 119.23,78.165 119.23,80.92 118.65,81.5 118.65,82.7
pads on no net: J2.4 P5.10 P7.4 U1.6 U1.7 U1.8 U1.17 U1.18 U1.22 U1.24 U1.32 U3.10 U3.11 U3.12 U3.13 U3.14 U3.15 U3.16 U3.17 U3.18 U3.19 U3.20 U3.21 U3.22 U3.29 U4.1 U4.5 U4.8 U5.1 U5.5 U5.8

## Polygon pours and split planes (outlines as drawn)
GND on Top Layer "TOP_GND" (solid, pour order 34): 78.3,126.974 78.3,44 177.8,44 177.8,127
NetD1_2 on Top Layer "NETD1_2_L01_P033" (solid, pour order 33): 158.5,116.35 160.575,116.35 160.575,101.775 154.375,95.575 112.025,95.575 112.025,97.95 152.975,97.95 158.5,103.475
VCC on Top Layer "VCC_L01_P026" (solid, pour order 26): 103.175,93.675 107.225,93.675 107.225,97.25 107.2,97.275 104.175,97.275 103.2,96.3
NetD1_2 on Top Layer "NETD1_2_L01_P020" (solid, pour order 20): 109.85,97.225 109.825,97.25 109.825,99.5 111,99.5 111.05,99.55 111.05,97.25
NetD1_2 on Top Layer "NETD1_2_L01_P025" (solid, pour order 25): 109.825,93.9 111.4,93.9 113.575,96.075 113.575,97.95 111.475,97.95 110.575,97.95 109.85,97.225
VCC3V3 on Top Layer "VCC3V3_L01_P031" (solid, pour order 31): 102.575,93.725 102.6,93.75 102.6,96.35 105.15,98.9 105.15,106.4 98.425,106.4 98.425,98.9 100.975,96.35 100.95,96.325 100.95,93.725
VCC on Top Layer "NetJB1" (solid, pour order 24): 149.083,81.472 149.083,83.885 144.765,83.885 144.765,81.472
VCC on Top Layer "NetJB1" (solid, pour order 27): 150.861,92.267 150.861,83.9 154.29,83.9 154.29,86.552 152.512,88.33 152.512,92.267
VCC on Top Layer "NetJB1" (solid, pour order 30): 147.3,83.885 147.3,89.859 147.3,92.525 150.85,92.525 150.85,83.885
VCC on Top Layer "NetJB1" (solid, pour order 21): 148.956,92.521 152.512,92.521 152.512,90.298 152.449,90.235 148.956,90.235
VCC on Top Layer "NetJB1" (solid, pour order 23): 148.702,56.58 148.702,58.993 144.384,58.993 144.384,56.58
VCC on Top Layer "NetJB1" (solid, pour order 28): 150.375,67.375 150.375,58.993 153.909,58.993 153.909,61.66 152.131,63.438 152.131,67.375
VCC on Top Layer "NetJB1" (solid, pour order 29): 147.3,58.993 147.3,67.629 150.475,67.629 150.475,58.993
VCC on Top Layer "NetJB1" (solid, pour order 22): 148.575,67.629 152.131,67.629 152.131,65.406 152.068,65.343 148.575,65.343
NetD1_1 on Top Layer "NetJB1" (solid, pour order 32): 171.129,121.158 171.256,121.031 171.256,117.729 170.494,116.967 170.494,112.141 161.858,112.141 161.858,118.096 165.033,121.158
GND on Bottom Layer "BOT_GND" (solid, pour order 37): 78.3,127 78.3,44 177.8,44 177.8,127
VCC on Bottom Layer "VCC_L02_P036" (solid, pour order 36): 103.2,96.35 103.175,96.325 103.175,93.675 111.2,93.675 113.15,95.625 146.3,95.625 147.475,94.45 147.475,97.95 111.025,97.95 110.975,97.9 107.8,97.9 107.2,97.3 104.2,97.3
VCC on Bottom Layer "VCC_L02_P035" (solid, pour order 35): 150.3,97.95 147.3,97.95 147.3,65.325 150.303,65.325 150.321,65.343

## Other copper
Top Layer:
  rectangle net VCC3V3: 99.05,98.275 104.275,102.375
  pour cut-out: 121.5,74 128,74 128,55.85 128.025,55.825 121.6,55.825
Bottom Layer:
  pour cut-out: 121.5,74 128,74 128,55.85 128.025,55.825 121.6,55.825

## Silkscreen, mask and mechanical layers (free items; w line width, h text height)
Top Overlay:
  drawing of 240 lines, arcs and shapes, not listed
Top Solder:
  rectangle: 78.3,122.675 177.8,127
  region: 177.8,48.325 78.3,48.325 78.3,44 177.8,44
Bottom Solder:
  rectangle: 78.3,122.675 177.8,127
  region: 177.8,48.325 78.3,48.325 78.3,44 177.8,44
Mechanical 1:
  lines w0.25: 77.8,44 77.8,85.5 219.1,85.35 ; 77.825,48.3 177.8,48.3 177.8,44 ; 77.875,122.7 177.825,122.7 ; 169.85,54.85 169.85,79.85 ; 171.85,79.85 219.1,79.85 219.1,85.35 ; 172.1,115.35 219.1,115.35 219.1,85.35 ; 177.8,44 177.8,127 78.3,127 78.3,44 177.8,44
Mechanical 2:
  the board outline again, w0.25

## Text inside footprints (layer, text, board x,y; h text height)
J2: Mechanical 1 "Board Edge" at 178.472,98.828 h0.3 r90
P4: Top Overlay "10" at 94.217,76.471 h1.27 r270; Top Overlay "9" at 91.677,76.471 h1.27 r270; Top Overlay "1" at 91.677,90.187 h1.27 r270; Top Overlay "2" at 94.217,90.695 h1.27 r270
P5: Top Overlay "10" at 106.468,90.104 h1.27 r90; Top Overlay "9" at 109.008,90.104 h1.27 r90; Top Overlay "1" at 109.008,76.388 h1.27 r90; Top Overlay "2" at 106.468,75.88 h1.27 r90
U1: Mechanical 1 "ANTENNA" at 123.621,70.616 h1.88 r270
U3: Mechanical 13 "*" at 127.948,90.561 h1.27 r270